# Altium PCB Expansion_hv2.PcbDoc (part 1 of 2)
Units mm, origin at the board's own origin, x right, y up, seen from the top; angles counter-clockwise.
Board outline 43 x 71 mm, 2 copper layers (Top Layer, Bottom Layer); 137 components, 76 nets, 388 pads, 241 vias.
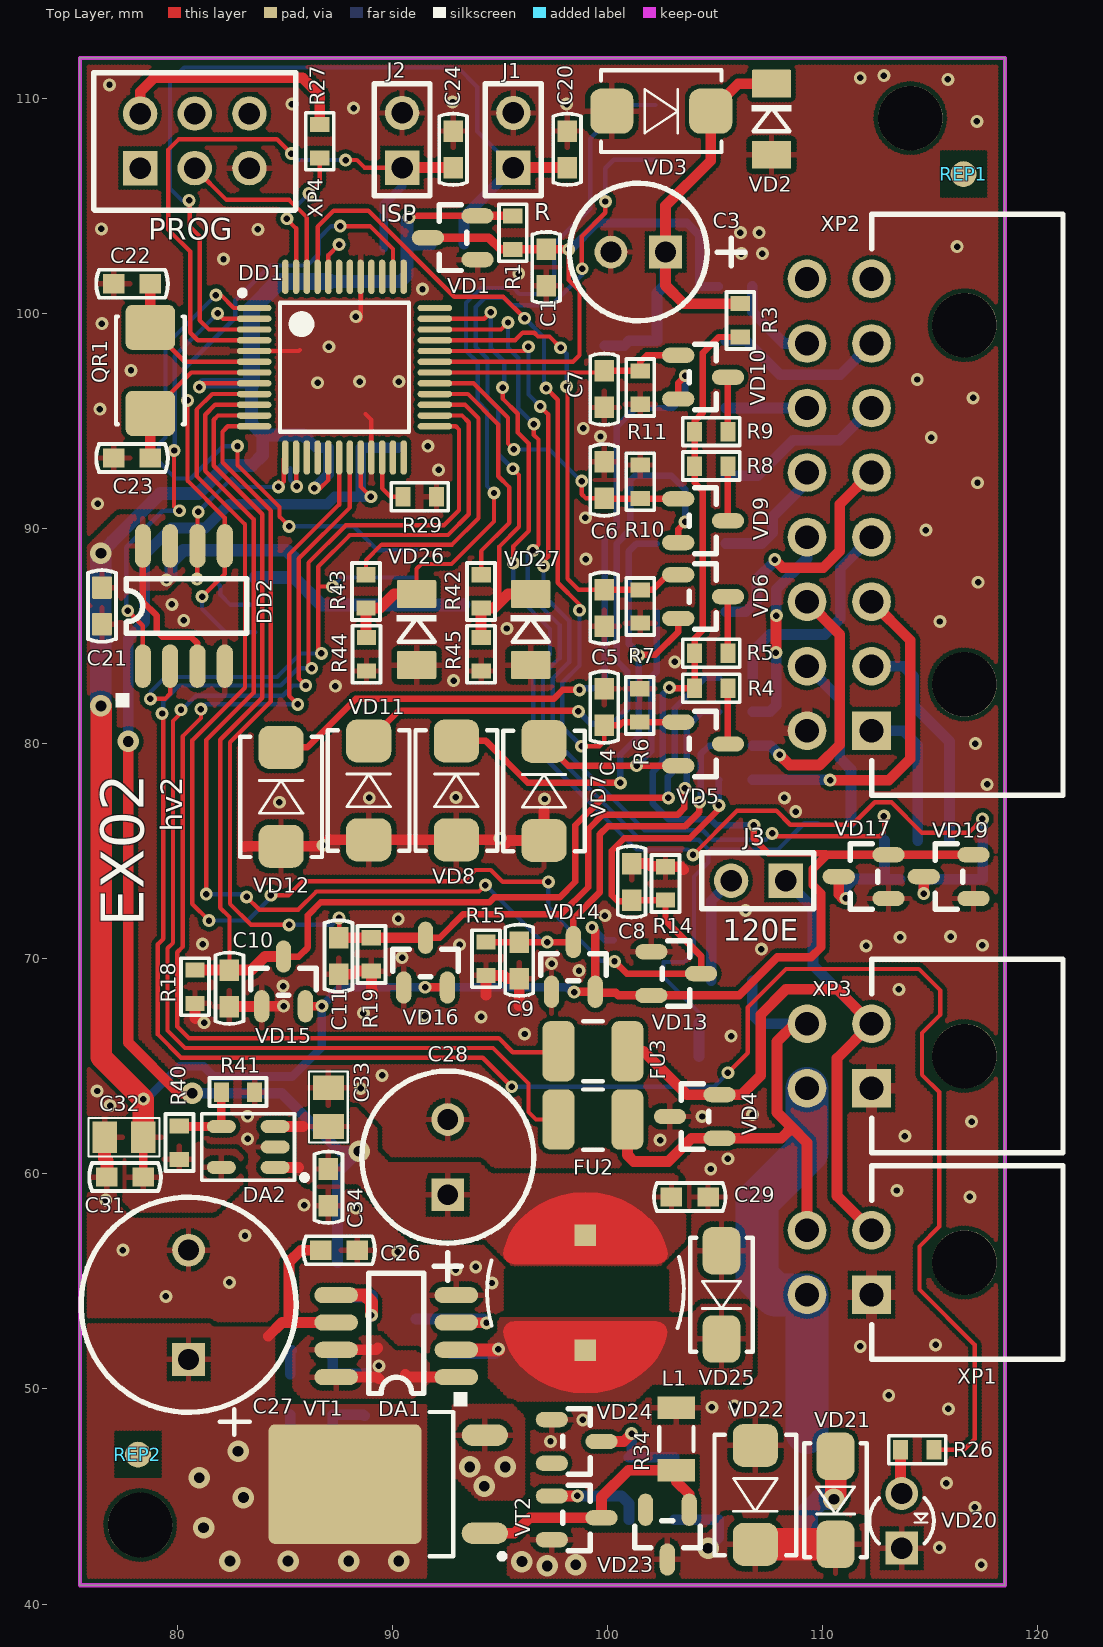
[diagram p0: Top Layer view]
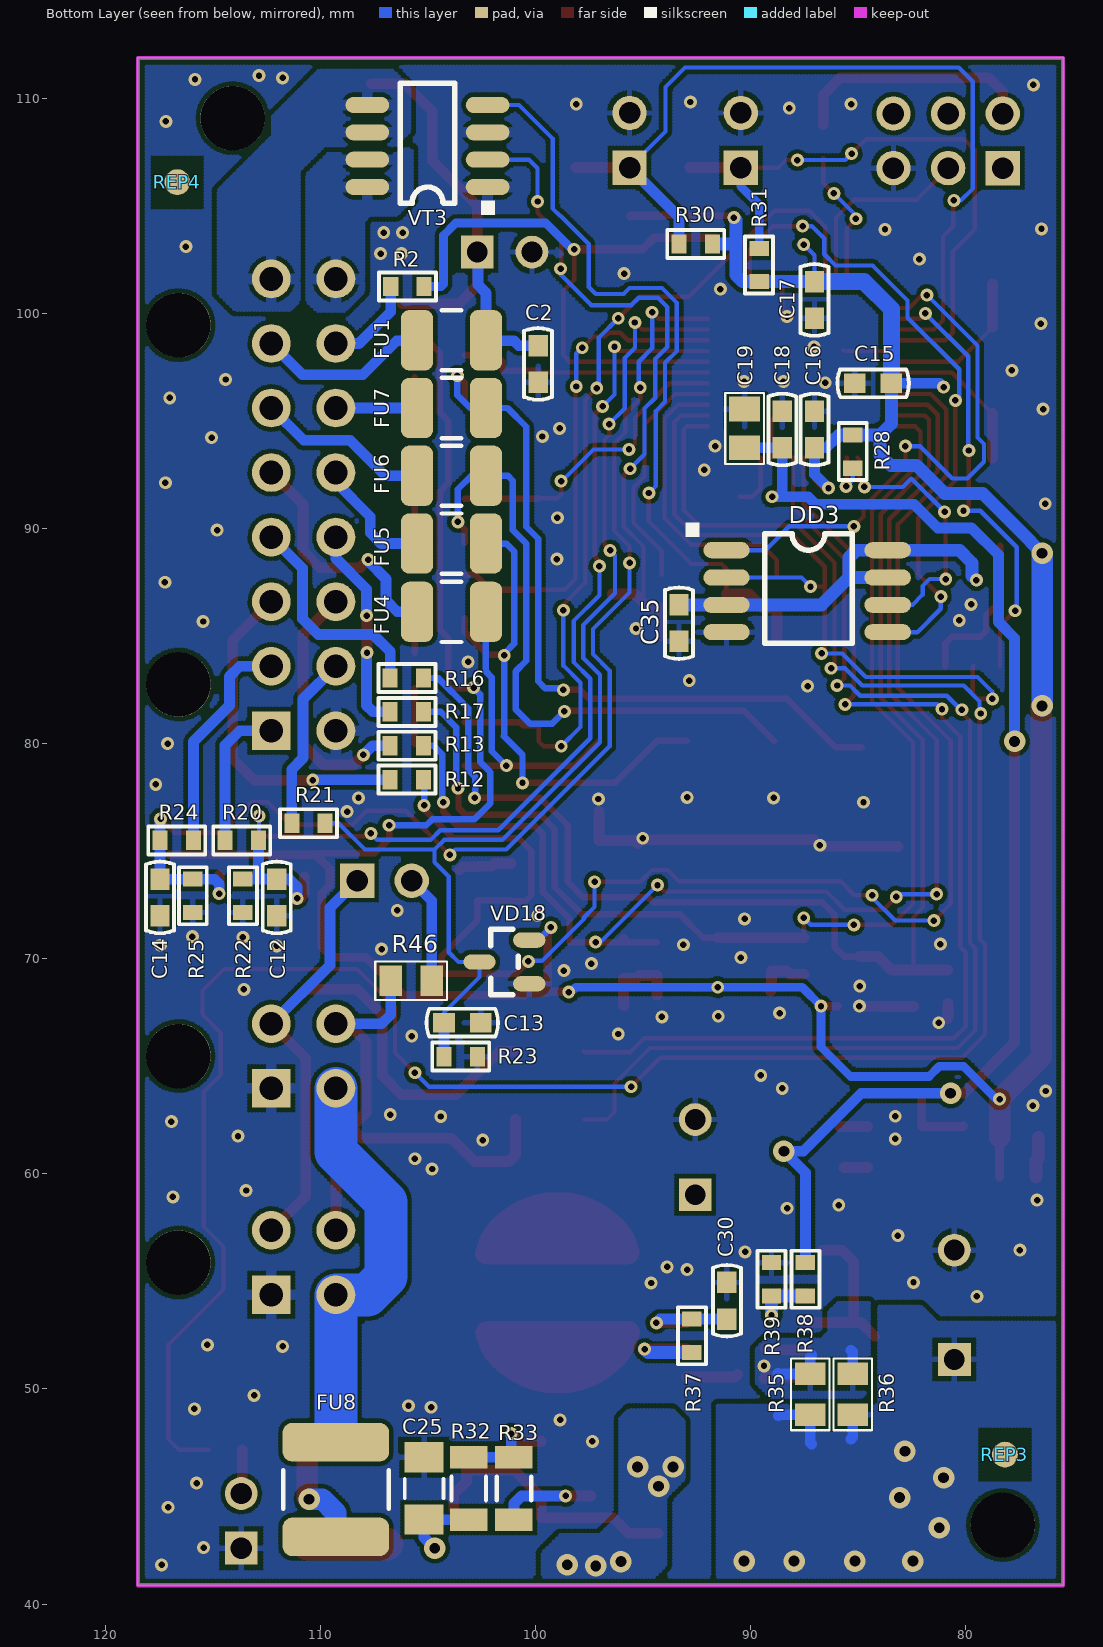
[diagram p1: Bottom Layer view, seen from below]

## Layer stack, top to bottom
Top Solder: solder mask 0.0102, Solder Resist, Dk 3.5
Top Layer: signal copper 0.0356
Dielectric 1: dielectric 0.32, FR-4, Dk 4.8
Bottom Layer: signal copper 0.0356
Bottom Solder: solder mask 0.0102, Solder Resist, Dk 3.5

## Board outline
75.475,40.875 118.475,40.875 118.475,111.875 75.475,111.875

## Design rules (kind name [scope] priority, off if disabled: settings)
Clearance Clearance_1 [InComponent('DD1')] p1: gap=0.2 ignorepadtopadclearanceinfootprint=FALSE
Clearance [All] p2: gap=0.2 ignorepadtopadclearanceinfootprint=FALSE
ComponentClearance [All] p1: gap=0.254 collisioncheckmode=3 verticalgap=2540 showdistances=FALSE
HoleSize [All] p1: absolutevalues=TRUE maxlimit=5 minlimit=0.025 maxpercent=80.000 minpercent=20.000
PolygonConnect PolygonConnect_2 [InComponent('VT3') AND InNet('PWM_CH1')  OR InComponent('VT3') AND InNet('PWM_CH2') OR InComponent('VT3') AND InNet('GND')  OR InComponent('XP2') AND InNet('PWM_CH1')  OR InComponent('XP2') AND InNet('PWM_CH2') OR InComponent('XP2') AND InNet('GND') OR InComponent('XP1') AND InNet('GND') OR InComponent('XP3') AND InNet('GND')] p1: connectstyle=Relief reliefconductorwidth=0.5 reliefentries=4 polygonreliefangle="90 Angle" airgapwidth=0.2
PolygonConnect PolygonConnect_1 [IsVia OR InComponent('VT1') AND InNet('VIN_F')] p2: connectstyle=Direct reliefconductorwidth=0.254 reliefentries=4 polygonreliefangle="90 Angle" airgapwidth=0.254
PolygonConnect [All] p3: connectstyle=Relief reliefconductorwidth=0.25 reliefentries=4 polygonreliefangle="90 Angle" airgapwidth=0.25
RoutingVias [All] p1: holewidth=0.4 width=0.8 viastyle="Through Hole" minholewidth=0.3 minwidth=0.6 maxholewidth=0.5 maxwidth=1
SilkToSolderMaskClearance [IsPad] p1: minsilkscreentomaskgap=0.15 clearancetoexposedcopper=TRUE
SolderMaskExpansion [All] p1: expansion=0.102
Width [All] p1: maxlimit=3 minlimit=0.2 preferedwidth=0.5
27 further rules are at their usual default settings.

## Classes and differential pairs
component class 1Wire: C1 C2 FU1 R1 R2 R3 VD1 VD2 VD3
component class Connections: FU2 FU3 J3 R46 VD4 XP1 XP2 XP3
component class Input_0: C4 C5 C6 C7 FU4 FU5 FU6 FU7 R4 R5 R6 R7 R8 R9 R10 R11 VD5 VD6 VD7 VD8 VD9 VD10 VD11 VD12
component class Input_1: C8 C9 C10 C11 R12 R13 R14 R15 R16 R17 R18 R19 VD13 VD14 VD15 VD16
component class Input_analog: C12 C13 C14 R20 R21 R22 R23 R24 R25 VD17 VD18 VD19
component class MCU: C15 C16 C17 C18 C19 C20 C21 C22 C23 C24 C35 DD1 DD2 DD3 J1 J2 QR1 R26 R27 R28 R29 R30 R31 REP1 REP2 REP3 REP4 VD20 XP4
component class Power: C25 C26 C27 C28 C29 C30 C31 C32 C33 C34 DA1 DA2 FU8 L1 R32 R33 R34 R35 R36 R37 R38 R39 R40 R41 VD21 VD22 VD23 VD24 VD25 VT1 VT2
component class PWM: R42 R43 R44 R45 VD26 VD27 VT3

## Components (designator, comment, footprint, x,y, rotation, side; value= is the part's Value field where it differs from the comment)
C1 "33pF" CC0603 97.15,102.125 r90 top
C2 "0.1uF" CC0603 99.875,97.65 r90 bottom
C3 "100uFx35V" CC20X2.54 102.7,102.85 r180 top
C4 "100pF" CC0603 99.85,81.7 r270 top
C5 "100pF" CC0603 99.85,86.3 r90 top
C6 "0.1uF" CC0603 99.848,92.25 r270 top
C7 "0.1uF" CC0603 99.85,96.475 r90 top
C8 "100pF" CC0603 101.121,73.575 r270 top
C9 "100pF" CC0603 95.9,69.925 r90 top
C10 "0.1uF" CC0603 82.425,68.625 r90 top
C11 "0.1uF" CC0603 87.5,70.125 r90 top
C12 "0.1uF" CC0603 112.023,72.85 r90 bottom
C13 "0.1uF" CC0603 103.4,67.027 r0 bottom
C14 "0.1uF" CC0603 117.45,72.85 r90 bottom
C15 "0.1uF" CC0603 84.3,96.75 r0 bottom
C16 "0.1uF" CC0603 87.025,94.6 r90 bottom
C17 "0.1uF" CC0603 87.025,100.625 r270 bottom
C18 "0.1uF" CC0603 88.525,94.602 r270 bottom
C19 "10uFx10V" CC0805 90.275,94.65 r270 bottom
C20 "200pF" CC0603 98.125,107.625 r270 top
C21 "0.1uF" CC0603-3M 76.5,86.4 r90 top
C22 "22pF" CC0603 77.9,101.375 r0 top
C23 "22pF" CC0603 77.9,93.275 r0 top
C24 "200pF" CC0603 92.825,107.625 r270 top
C25 "0.1uF" CC1206 105.175,45.375 r270 bottom
C26 "0.1uF" CC0603 87.525,56.45 r180 top
C27 "470uFx35V" CC16X10_CAP0.5(1)(Primary) 80.525,51.375 r90 top
C28 "1000uFx6.3V" CC8X3.5 92.575,59.025 r90 top
C29 "0.1uF" CC0603 103.825,58.925 r180 top
C30 "300pF" CC0603 91.1,54.1 r270 bottom
C31 "0.1uF" CC0603 77.575,59.85 r180 top
C32 "10uFx6.3V" CC0805 77.525,61.7 r0 top
C33 "4.7uF 6.3V" CC0805 87.025,63.1 r270 top
C34 "0.1uF" CC0603 87.025,59.375 r270 top
C35 "0.1uF" CC0603 93.325,85.6 r270 bottom
DA1 "MC34063" SO-8 92.975,50.55 r90 top
DA2 "AP2210K-ADJTRG1" SOT23-5 83.3,61.25 r180 top
DD1 "LPC11C24FBD48" LQFP-48 87.775,97.5 r0 top
DD2 "FM25CL64-G" SO-8 78.4,83.6 r0 top
DD3 "M25PE16" EIAJ_SO8 91.118,88.99 r180 bottom
FU1 "MICROSMD010F-2" RC1210 103.9,98.75 r180 bottom
FU2 "MICROSMD010F-2" RC1210 99.325,62.525 r180 top
FU3 "MICROSMD010F-2" RC1210 99.325,65.7 r180 top
FU4 "MICROSMD010F-2" RC1210 103.9,86.125 r180 bottom
FU5 "MICROSMD010F-2" RC1210 103.9,89.3 r180 bottom
FU6 "MICROSMD010F-2" RC1210 103.9,92.45 r180 bottom
FU7 "MICROSMD010F-2" RC1210 103.9,95.6 r180 bottom
FU8 "MF-SMDF050" MF-SMDF 109.275,45.325 r270 bottom
J1 "PLS-02" PLS-02 95.625,106.775 r90 top
J2 "PLS-02" PLS-02 90.45,106.775 r90 top
J3 "PLS-02" PLS-02 108.29,73.625 r180 top
L1 "220uH" SDR0805 98.975,54.475 r270 top
QR1 "NX5032GA-12.000MHz LN-CD-1" AC5032_2 78.75,97.35 r270 top
R1 "4k7" RC0603 95.6,103.75 r90 top
R2 "330E" RC0603 105.95,101.25 r180 bottom
R3 "51E" RC0603 106.175,99.675 r270 top
R4 "4k7" RC0603 104.825,82.575 r180 top
R5 "4k7" RC0603 104.825,84.2 r180 top
R6 "100k" RC0603 101.5,81.775 r270 top
R7 "100k" RC0603 101.525,86.375 r90 top
R8 "4k7" RC0603 104.825,92.9 r180 top
R9 "4k7" RC0603 104.825,94.5 r180 top
R10 "100k" RC0603 101.525,92.175 r270 top
R11 "100k" RC0603 101.525,96.55 r90 top
R12 "100k" RC0603 105.975,78.325 r180 bottom
R13 "100k" RC0603 105.975,79.9 r180 bottom
R14 "10k" RC0603 102.696,73.5 r270 top
R15 "10k" RC0603 94.35,70 r90 top
R16 "100k" RC0603 105.975,83.05 r180 bottom
R17 "100k" RC0603 105.975,81.475 r180 bottom
R18 "10k" RC0603 80.825,68.7 r90 top
R19 "10k" RC0603 89.025,70.2 r90 top
R20 "100k" RC0603 113.65,75.5 r180 bottom
R21 "100k" RC0603 110.55,76.3 r180 bottom
R22 "10k" RC0603 113.6,72.925 r90 bottom
R23 "10k" RC0603 103.475,65.45 r0 bottom
R24 "100k" RC0603 116.675,75.5 r0 bottom
R25 "10k" RC0603 115.925,72.925 r90 bottom
R26 "330E" RC0603 114.4,47.175 r180 top
R27 "100E" RC0603 86.625,108 r90 top
R28 "10k" RC0603 85.25,93.575 r270 bottom
R29 "10k" RC0603 91.275,91.475 r180 top
R30 "10k" RC0603 92.55,103.225 r0 bottom
R31 "10k" RC0603 89.6,102.25 r90 bottom
R32 "220k" RC1206 103.1,45.375 r270 bottom
R33 "220k" RC1206 101,45.375 r270 bottom
R34 "220k" RC1206 103.2,47.675 r90 top
R35 "1E" RC0805 87.225,49.75 r270 bottom
R36 "1E" RC0805 85.25,49.75 r270 bottom
R37 "560k" RC0603 92.725,52.475 r90 bottom
R38 "3k 1%" RC0603 87.45,55.1 r270 bottom
R39 "1k 1%" RC0603 89.025,55.1 r270 bottom
R40 "11k 1%" RC0603 80.1,61.45 r270 top
R41 "18k 1%" RC0603 82.825,63.8 r180 top
R42 "220E" RC0603 94.125,87.075 r270 top
R43 "220E" RC0603 88.775,87.075 r270 top
R44 "10k" RC0603 88.8,84.15 r90 top
R45 "10k" RC0603 94.125,84.15 r90 top
R46 "120E" RC0805 105.775,68.975 r0 bottom
REP1 "REPER_POINT_1.2" REPER1.2 116.55,106.475 r90 top
REP2 "REPER_POINT_1.2" REPER1.2 78.175,46.95 r90 top
REP3 "REPER_POINT_1.2" REPER1.2 78.175,46.95 r90 bottom
REP4 "REPER_POINT_1.2" REPER1.2 116.65,106.1 r90 bottom
VD1 "BAT54S" SOT-23(GSD) 93.975,102.5 r90 top
VD2 "BZV55C3V6" SOD-80 107.625,109.025 r270 top
VD3 "SMBJ5.0A" SMB 102.5,109.4 r180 top
VD4 "PESD2CAN" SOT-23(123) 105.225,61.65 r0 top
VD5 "BAT54A" SOT-23(123) 103.275,81 r180 top
VD6 "BAT54A" SOT-23(123) 103.275,87.85 r180 top
VD7 "P6SMBJ28A" SMB 97.05,77.8 r270 top
VD8 "P6SMBJ28A" SMB 92.975,77.825 r270 top
VD9 "BAT54A" SOT-23(123) 103.275,91.375 r180 top
VD10 "BAT54A" SOT-23(123) 103.275,98.05 r180 top
VD11 "P6SMBJ28A" SMB 88.9,77.825 r270 top
VD12 "P6SMBJ28A" SMB 84.825,77.525 r270 top
VD13 "BAT54S" SOT-23(GSD) 102.025,70.325 r270 top
VD14 "BAT54S" SOT-23(GSD) 97.4,68.45 r0 top
VD15 "BAT54S" SOT-23(GSD) 83.925,67.775 r0 top
VD16 "BAT54S" SOT-23(GSD) 90.525,68.65 r0 top
VD17 "BAT54S" SOT-23(GSD) 113.075,72.8 r90 top
VD18 "BAT54S" SOT-23(GSD) 100.276,68.834 r90 bottom
VD19 "BAT54S" SOT-23(GSD) 117.025,72.8 r90 top
VD20 "BL-B45V1-L" LED3 113.675,42.6 r90 top
VD21 "GS1M" SMA 110.6,44.825 r270 top value={Value}
VD22 "SMBJ150A" SMB 106.875,45.075 r90 top
VD23 "BZX84C15" SOT-23(123) 103.8,44.4 r90 top value={Value}
VD24 "BZX84C39" SOT-23(123) 97.4,48.575 r180 top value={Value}
VD25 "SS14" SMA 105.3,54.375 r270 top
VD26 "BZV55C5V1" SOD-80 91.125,85.3 r270 top
VD27 "BZV55C5V1" SOD-80 96.425,85.3 r270 top
VT1 "FQD5P20TM" D-PAK(TO-252AA) 89.8,45.575 r180 top
VT2 "BC807-40" SOT-23(123) 97.4,45.025 r180 top
VT3 "IRF9956" SO-8 102.225,105.875 r90 bottom
XP1 "MIF2X02PRP" MIF2X02PRP 112.275,54.375 r0 top
XP2 "MIF2X08PRP" MIF2X08PRP 112.275,80.6 r0 top
XP3 "MIF2X02PRP" MIF2X02PRP 112.275,63.975 r0 top
XP4 "PLD-06" PIN6 78.275,106.75 r0 top

## Footprints (in the part's own frame and the unit in brackets; to place one, negate y for a bottom-side part, rotate by r counter-clockwise, add the part's x,y. Pads: shape width x height; smd on the part's side, far side on the other; paste and mask are expansions set on the pad)
AC5032_2 [mm]
  rrect30% 2.1x2.3 smd mask+0.05: 1(-2,0) 2(2,0)
  silkscreen extent -2.5,-1.6 2.5,1.6
CC8X3.5 [mil]
  rect 60x60 hole 38 mask+1.97: 1(0,0)
  round 60 hole 38 mask+1.97: 2(137.8,0)
  silkscreen extent -156,-157 226,157
CC16X10_CAP0.5(1)(Primary) [mil]
  round 60 hole 38 mask+1.97: 1(200,0)
  rect 60x60 hole 38 mask+1.97: 2(0,0)
  silkscreen extent -97,-197 297,197
CC20X2.54 [mil]
  rect 60x60 hole 38 mask+1.97: 1(0,0)
  round 60 hole 38 mask+1.97: 2(100,0)
  silkscreen extent -145,-126 176,126
CC0603 [mm]
  rect 1x0.9 smd paste-25.4 mask+0.05: 1(-0.85,0) 2(0.85,0)
  silkscreen extent -1.66,-0.65 1.66,0.65
CC0603-3M [mil]
  rrect10% 40.98x35.98 smd paste-1000 mask+1.97: 1(-33.5,0) 2(33.5,0)
  silkscreen extent -65,-26 65,26
CC0805 [mm]
  rect 1.15x1.45 smd paste-25.4 mask+0.05: 1(-0.9,0) 2(0.9,0)
  silkscreen extent -1.65,-0.9 1.65,0.9
CC1206 [mm]
  rect 1.4x1.8 smd paste-25.4 mask+0.05: 1(-1.45,0) 2(1.45,0)
  silkscreen extent -0.45,-0.9 0.45,0.9
D-PAK(TO-252AA) [mm]
  oval 2.15x1 smd mask+0.05: 1(-4.5,2.28) 3(-4.5,-2.28)
  rrect10% 7.1x5.55 smd mask+0.05: 2(2,0)
  silkscreen extent -5.42,-3.35 -1.92,3.47
EIAJ_SO8 [mil]
  oval 85x29.53 smd mask+1.97: 1(0,0) 2(0,-50) 3(0,-100) 4(0,-150) 5(295,-150) 6(295,-100) 7(295,-50) 8(295,0)
  silkscreen extent -75,-170 230,50
LED3 [mil]
  rect 60x60 hole 39 mask+1.97: 1(0,0)
  round 60 hole 39 mask+1.97: 2(100,0)
  silkscreen extent 8,-59 92,59
LQFP-48 [mm]
  oval 1.6x0.3 smd mask+0.05: 1(-4.2,2.75) 2(-4.2,2.25) 3(-4.2,1.75) 4(-4.2,1.25) 5(-4.2,0.75) 6(-4.2,0.25) 7(-4.2,-0.25) 8(-4.2,-0.75) 9(-4.2,-1.25) 10(-4.2,-1.75) 11(-4.2,-2.25) 12(-4.2,-2.75) 25(4.2,-2.75) 26(4.2,-2.25) 27(4.2,-1.75) 28(4.2,-1.25) 29(4.2,-0.75) 30(4.2,-0.25) 31(4.2,0.25) 32(4.2,0.75) 33(4.2,1.25) 34(4.2,1.75) 35(4.2,2.25) 36(4.2,2.75)
  oval 0.3x1.6 smd mask+0.05: 13(-2.75,-4.2) 14(-2.25,-4.2) 15(-1.75,-4.2) 16(-1.25,-4.2) 17(-0.75,-4.2) 18(-0.25,-4.2) 19(0.25,-4.2) 20(0.75,-4.2) 21(1.25,-4.2) 22(1.75,-4.2) 23(2.25,-4.2) 24(2.75,-4.2) 37(2.75,4.2) 38(2.25,4.2) 39(1.75,4.2) 40(1.25,4.2) 41(0.75,4.2) 42(0.25,4.2) 43(-0.25,4.2) 44(-0.75,4.2) 45(-1.25,4.2) 46(-1.75,4.2) 47(-2.25,4.2) 48(-2.75,4.2)
  silkscreen extent -4.87,-3 3,3.57
MF-SMDF [mm]
  rrect50% 1.8x4.95 smd mask+0.05: 1(-2.2,0) 2(2.2,0)
  silkscreen extent -0.9,-2.45 0.9,2.45
MIF2X02PRP [mm]
  rect 1.8x1.8 hole 1.1 mask+0.05: 1(0,0)
  round 1.8 hole 1.1 mask+0.05: 2(0,3) 3(-3,0) 4(-3,3)
  round 3 hole 3 unplated mask+0.05: 5(4.32,1.5)
  silkscreen extent 0,-3 8.9,6
MIF2X08PRP [mm]
  rect 1.8x1.8 hole 1.1 mask+0.05: 1(0,0)
  round 1.8 hole 1.1 mask+0.05: 2(0,3) 3(0,6) 4(0,9) 5(0,12) 6(0,15) 7(0,18) 8(0,21) 9(-3,0) 10(-3,3) 11(-3,6) 12(-3,9) 13(-3,12) 14(-3,15) 15(-3,18) 16(-3,21)
  round 3 hole 3 unplated mask+0.05: 17(4.32,2.15) 18(4.32,18.85)
  silkscreen extent 0,-3 8.9,24
PIN6 [mm]
  rect 1.6x1.6 hole 1 mask+0.05: 1(0,0)
  round 1.6 hole 1 mask+0.05: 2(0,2.54) 3(2.54,0) 4(2.54,2.54) 5(5.08,0) 6(5.08,2.54)
  silkscreen extent -2.16,-1.96 7.24,4.44
PLS-02 [mm]
  rect 1.6x1.6 hole 1 mask+0.05: 1(0,0)
  round 1.6 hole 1 mask+0.05: 2(2.54,0)
  silkscreen extent -1.3,-1.3 3.9,1.3
RC0603 [mm]
  rect 0.7x0.9 smd paste-25.4 mask+0.05: 1(-0.775,0) 2(0.774,0)
  silkscreen extent -1.32,-0.65 1.33,0.65
RC0805 [mm]
  rect 1.05x1.4 smd paste-25.4 mask+0.05: 1(-0.95,0) 2(0.95,0)
  silkscreen extent -1.67,-0.89 1.67,0.89
RC1206 [mm]
  rect 1.05x1.75 smd paste-25.4 mask+0.05: 1(-1.45,0) 2(1.45,0)
  silkscreen extent -0.55,-0.8 0.55,0.8
RC1210 [mm]
  rrect50% 1.5x2.8 smd mask+0.05: 1(-1.6,0) 2(1.6,0)
  silkscreen extent -0.45,-1.4 0.45,1.4
REPER1.2 [mm]
  round 1.2 smd paste-25.4 mask+0.05: 1(0,0)
  Top Layer pour cut-out: -1.2,-1.2 1.2,-1.2 1.2,1.2 -1.2,1.2
SDR0805 [mm]
  rect 1x1 smd paste-25.4 mask+0.05: 1(-2.667,0) 2(2.667,0)
  Top Layer region: 1.327,-3.319 1.362,-3.503 1.461,-3.66 1.612,-3.771 1.792,-3.818 1.977,-3.797 2.318,-3.69 2.706,-3.535 3.065,-3.321 3.387,-3.053 3.392,-3.047 3.771,-2.627 4.09,-2.16 4.345,-1.654 4.53,-1.119 4.642,-0.565 4.68,0 4.642,0.565 4.53,1.119 4.345,1.654 4.09,2.16 3.771,2.627 3.392,3.047 3.381,3.059 3.063,3.323 2.709,3.534 2.325,3.688 1.996,3.791 1.806,3.813 1.62,3.764 1.465,3.65 1.363,3.488 1.327,3.299
  Top Layer region: -1.327,3.319 -1.362,3.503 -1.461,3.66 -1.612,3.771 -1.792,3.818 -1.977,3.797 -2.318,3.69 -2.706,3.535 -3.065,3.321 -3.387,3.053 -3.392,3.047 -3.771,2.627 -4.09,2.16 -4.345,1.654 -4.53,1.119 -4.642,0.565 -4.68,0 -4.642,-0.565 -4.53,-1.119 -4.345,-1.654 -4.09,-2.16 -3.771,-2.627 -3.392,-3.047 -3.381,-3.059 -3.063,-3.323 -2.709,-3.534 -2.325,-3.688 -1.996,-3.791 -1.806,-3.813 -1.62,-3.764 -1.465,-3.65 -1.363,-3.488 -1.327,-3.299
  silkscreen extent -1.66,-4.57 1.64,4.57
SMA [mm]
  rrect50% 2.2x1.75 smd mask+0.05: 1(-2.05,0) 2(2.05,0)
  silkscreen extent -2.65,-1.45 2.65,1.45
SMB [mm]
  rrect50% 2x2.1 smd mask+0.05: 1(2.3,0) 2(-2.3,0)
  silkscreen extent -2.8,-1.9 2.8,1.9
SO-8 [mil]
  oval 29.53x80 smd mask+1.97: 1(0,0) 2(50,0) 3(100,0) 4(150,0) 5(150,220) 6(100,220) 7(50,220) 8(0,220)
  silkscreen extent -53,-20 190,160
SOD-80 [mm]
  rrect10% 1.3x1.83 smd paste-25.4 mask+0.05: 1(1.651,0) 2(-1.651,0)
  silkscreen extent -0.66,-0.91 0.56,0.91
SOT23-5 [mm]
  oval 1.35x0.6 smd mask+0.05: 1(-1.25,0.95) 2(-1.25,0) 3(-1.25,-0.95) 4(1.25,-0.95) 5(1.25,0.95)
  silkscreen extent -2.74,-1.55 2.16,1.55
SOT-23(123) [mil]
  oval 59.06x28.07 smd mask+1.97: 1(-0.5,0) 2(-0.5,80) 3(-91.5,40)
  silkscreen extent -71,-20 -20,100
SOT-23(GSD) [mil]
  oval 28.07x59.06 smd mask+1.97: 1(0,0.5) 2(80,0.5) 3(40,91.5)
  silkscreen extent -20,21 100,70

## Part data
C1 C2 C4 C5 C6 C7 C8 C9 C10 C11 C12 C13 C14 C15 C16 C17 C18 C20 C21 C22 C23 C24 C26 C29 C30 C31 C34 C35: library part CC0603, "CC0603"
C3: library part CAP0.25, "CAP0.25"
C19 C32 C33: library part CC0805, "CC0805"
C25: library part CC1206, "CC1206"
C27: library part CAP0.5(1), "CAP0.5(1)"
C28: library part CAP0.35, "CAP0.35"
DA2: library part MCP1824T-ADJE/OT, "300 mA, Low Voltage, Low Quiescent Current LDO Regulator, 5-Pin SOT-223, Extended Temperature, Tape and Reel", ComponentLink1Description="Manufacturer Link", ComponentLink1URL=http://www.microchip.com, ComponentLink2Description=Datasheet, ComponentLink2URL=http://ww1.microchip.com/downloads/en/DeviceDoc/22070a.pdf, ComponentLink3Description="Packaging Specification", ComponentLink3URL=http://ww1.microchip.com/downloads/en/PackagingSpec/00049AW.pdf, DatasheetVersion="revA, Aug-2007", PackageDescription="5-Lead Plastic Small Outline Transistor (DC) [SOT-223]", PackageReference=SOT-223-DC5, PackageVersion="revAW, Oct-2008", Published=29-Jan-2009, Publisher="Altium Limited"
DD3: library part S25FL016A0LMFI01, "S25FL016A0LMFI01"
FU1 FU2 FU3 FU4 FU5 FU6 FU7: library part MICROSMD, "MICROSMD"
FU8: library part MF-SMDF, "MF-SMDF"
L1: library part SDR0805, "SDR0805"
QR1: library part AC5032_2, "AC5032/2"
R1 R2 R3 R4 R5 R6 R7 R8 R9 R10 R11 R12 R13 R14 R15 R16 R17 R18 R19 R20 R21 R22 R23 R24 R25 R26 R27 R28 R29 R30 R31 R37 R38 R39 R40 R41 R42 R43 R44 R45: library part RC0603, "RC0603"
R32 R33 R34: library part RC1206, "RC1206"
R35 R36 R46: library part RC0805, "RC0805"
REP1 REP2 REP3 REP4: library part REPER1.2, "REPER1.2"
VD1 VD5 VD6 VD9 VD10 VD13 VD14 VD15 VD16 VD17 VD18 VD19: "1.0 Ampere General Purpose Rectifier", ComponentField6="Published 8-Jun-2000, Modified 11-July-2000: SIM Model Added."
VD2: library part BZV55C5V1, "Zener Voltage Regulator Diode", ComponentField6="Pin 2 is not connected and not drawn.", ComponentField7="Published 29-Sep-2000", OriginalName=BZX84C10LT1
VD3 VD7 VD8 VD11 VD12 VD22: library part SMBJ, "SMBJ"
VD4: "TVS for CAN"
VD20: library part LED_3, "LED_3"
VD23 VD24: library part BZX84, "Zener Voltage Regulator Diode"
VD25: "Schottky Rectifier", ComponentField6="Published 8-Jun-2000, Modified 10-July-2000: SIM Model Added.", OriginalName=10BQ100
VD26 VD27: "Zener Voltage Regulator Diode", ComponentField6="Pin 2 is not connected and not drawn.", ComponentField7="Published 29-Sep-2000", OriginalName=BZX84C10LT1
VT1: library part IRFR9220, "HEXFET Power MOSFET", ComponentField7="Published 8-Jun-2000", OriginalName=IRLML5103
VT2: library part BC857B, "BC857B", ComponentField7="Published 29-Sep-2000", OriginalName=BC846BLT1
VT3: "HEXFET Power MOSFET", ComponentField7="Published 8-Jun-2000", OriginalName=IRLML2402
XP4: "PLD06"

## Free pads (board coordinates)
  round 3 hole 3 unplated mask+0.05: 0(78.275,43.675) 0(114.075,109.075)

## Via types
v1: diameter 0.6, hole 0.3, Top Layer to Bottom Layer, 220 vias
v2: diameter 1, hole 0.5, Top Layer to Bottom Layer, 21 vias

## Nets (pads, with @x,y where several pads share a name; then routed paths per layer and width w, separated by ;. In a path a pad name is that pad's centre, name@x,y a point inside that pad or via, vN(x,y) a via of type N, cw(c..) or ccw(c..) an arc to the next point about the centre after c; other vN are vias at no path point)
1_WIRE_PWR: FU1.1 XP2.7 | length 8
  Bottom Layer w0.5: FU1.1@105.5,98.725 106.45,98.725 108.025,97.15 110.825,97.15 XP2.7@112.275,98.6
1WIRE: C1.2 DD1.31 R1.1 R2.2 VD1.3 | length 28.8
  Top Layer w0.2: DD1.31@91.975,97.75 98.4,97.75 98.7,98.05 98.7,101.05 98.2,101.55 v1(98.2,102.975)
  Top Layer w0.4: VD1.3@91.651,103.516 94.48,103.516 95.021,102.975 R1.1@95.6,102.975 C1.2@97.15,102.975 v1(98.2,102.975)
  Bottom Layer w0.4: v1(98.2,102.975) 98.29,102.975 99.515,104.2 103.7,104.2 104.275,103.625 104.275,101.35 104.375,101.25 R2.2@105.176,101.25
1WIRE_DQ: R2.1 XP2.15 | length 4.3
  Bottom Layer w0.5: R2.1@106.725,101.25 106.725,100.075 108.2,98.6 XP2.15@109.275,98.6
+3V3: C15.1 C16.1 C17.1 C21.2 C31.1 C32.2 C35.1 DA2.5 DD1.8 DD1.17 DD1.44 DD2.3 DD2.7 DD2.8 DD3.3 DD3.7 DD3.8 R1.2 R3.2 R4.2 R5.2 R8.2 R9.2 R28.1 R30.1 R31.1 R40.2 VD1.2 VD13.2 VD14.2 VD15.2 VD16.2 VD17.2 VD18.2 VD19.2 | length 193.1
  Top Layer w0.2: v1(81.025,96.575) 81.2,96.75 DD1.8@83.575,96.75 ; v1(86.375,91.875) 86.65,91.875 87.025,92.25 DD1.17@87.025,93.3 ; DD1.44@87.025,101.7 87.025,102.7 v1(87.525,103.2)
  Top Layer w0.3: DD2.8@78.4,89.188 78.4,86.6 79.05,85.95 79.05,85.225 79.309,84.966 80.634,84.966 80.94,84.66 DD2.3@80.94,83.6 ; v1(90.775,104.45) 90.857,104.532 VD1.2@93.962,104.532 ; v1(102.875,82.6) 102.9,82.575 R4.2@104.051,82.575 R5.2@104.051,84.2 104.051,84.901 104.438,85.288 104.438,91.737 104.051,92.124 R8.2@104.051,92.9 R9.2@104.051,94.5 104.051,95.001 104.438,95.388 104.438,98.163 105.176,98.901 R3.2@106.175,98.901 ; v1(106.805,76.204) 106.805,75.57 107.475,74.9 110.139,74.9 110.207,74.832
  Top Layer w0.4: C31.1@78.425,59.85 C32.2@78.425,61.7 ; VD15.2@85.957,67.788 86.713,67.788 v1(86.725,67.8) ; v1(91.525,68.675) 92.545,68.675 VD16.2@92.557,68.663 ; VD1.2@93.962,104.532 95.592,104.532 R1.2@95.6,104.524 ; v1(98.45,68.45) 98.463,68.463 VD14.2@99.432,68.463 ; v1(99.28,71.453) 99.432,71.301 VD14.2@99.432,68.463 ; VD19.2@117.012,74.832 VD17.2@113.062,74.832 110.207,74.832 109.551,74.176 109.551,73.424 109.925,73.05 109.925,70.525 109.475,70.075 107.9,70.075 106.118,68.293 VD13.2@102.038,68.293 100.507,68.293 100.375,68.425 99.47,68.425 VD14.2@99.432,68.463
  Top Layer w1: v2(76.45,81.75) 76.475,81.725 76.475,65.425 v1(78.425,63.475) C32.2@78.425,61.7
  Bottom Layer w0.2: C17.1@87.025,101.475 87.025,102.7 v1(87.525,103.2) v1@87.775,103.2
  Bottom Layer w0.3: v1(99.28,71.453) 99.867,70.866 VD18.2@100.289,70.866 ; v1(102.875,82.6) 102.575,82.3 102.575,79.15 102.1,78.675 102.1,77.219 102.844,76.475 104.8,76.475 105.071,76.204 v1(106.805,76.204)
  Bottom Layer w0.4: v1(78.425,63.475) 78.575,63.475 80.1,65 81.225,65 81.7,64.525 85.35,64.525 86.725,65.9 v1(86.725,67.8) 87.6,68.675 v1(91.525,68.675) 98.125,68.675 98.35,68.45 v1(98.45,68.45)
  Bottom Layer w0.5: v1(81.025,96.575) 81.2,96.75 C15.1@83.45,96.75 ; 86.025,94.2 86.475,93.75 C16.1@87.025,93.75 87.025,92.525 v1(86.375,91.875)
  Bottom Layer w0.6: v2@76.45,88.65 v2(76.45,88.85) 76.975,89.375 76.975,89.394 78.856,91.275 ; 78.856,91.275 79.206,91.625 80.976,91.625 82.276,92.925 83.475,92.925 83.975,93.425 83.975,94.35 ; v1(79.5,87.6) 79.7,87.8 79.7,88.4 80.29,88.99 DD3.8@83.625,88.99 85.085,88.99 85.43,88.645 85.43,87.72 ; C15.1@83.45,96.75 83.45,94.875 83.975,94.35 ; DD3.7@83.625,87.72 85.43,87.72 ; 86.025,94.2 85.875,94.35 R28.1@85.25,94.35 83.975,94.35 ; C17.1@87.025,101.475 R31.1@89.6,101.475 90.375,101.475 90.675,101.775 90.675,103.175 ; v1(90.775,104.45) 90.675,104.35 90.675,103.175 ; R30.1@91.775,103.225 90.725,103.225 90.675,103.175 ; C35.1@93.325,86.475 93.3,86.45 DD3.3@91.118,86.45 86.7,86.45 85.43,87.72
  Bottom Layer w0.8: C15.1@83.45,96.75 83.45,100.2 84.725,101.475 C17.1@87.025,101.475
  Bottom Layer w1: v2(76.45,81.75) v2@76.45,88.65
+5V: C18.2 C19.2 C28.1 C29.2 C33.2 C34.1 DA2.1 DA2.3 DD1.20 L1.1 R38.1 | length 61.5
  Top Layer w0.2: DD1.20@88.525,93.3 88.525,91.95 v1(89,91.475)
  Top Layer w0.5: v2(77.725,80.1) 77.725,66.1 80.075,63.75 v2(80.7,63.75) ; DA2.1@84.55,60.3 85.65,60.3 ; DA2.3@84.55,62.2 85.85,62.2
  Bottom Layer w0.5: v2(77.725,80.1) 77.725,84.9 78.475,85.65 78.475,88.775 79.725,90.025 81.3,90.025 82.4,91.125 86.975,91.125 87.325,91.475 88.5,91.475 ; v2(80.7,63.75) 84.85,63.75 87.55,61.05 v2(88.45,61.05) 87.45,60.05 R38.1@87.45,55.875 ; v1(89,91.475) 88.5,91.475 ; C19.2@90.275,93.75 88.527,93.75 C18.2@88.525,93.752 88.525,91.5 88.5,91.475
ANALOG1: R20.1 XP2.1 | length 6.9
  Bottom Layer w0.5: XP2.1@112.275,80.6 113.75,80.6 114.425,79.925 R20.1@114.425,75.5
ANALOG1_F: C12.2 DD1.32 R20.2 R22.2 VD17.3 | length 50.7
  Top Layer w0.2: DD1.32@91.975,98.25 96.125,98.25 v1(96.325,98.45) ; v1(96.875,95.675) 97.24,95.31 97.24,88.69 97.025,88.475 v1(97.025,88.25) ; v1@107.475,75.825 v1(107.65,75.825) 107.775,75.7 112.65,75.7 112.85,75.9 v1(112.85,76.625)
  Top Layer w0.5: VD17.3@110.751,73.816 110.751,73.001 110.948,72.804 v1(111.08,72.804)
  Bottom Layer w0.2: v1(96.325,98.45) 96.325,96.225 v1(96.875,95.675) ; v1(97.025,88.25) 97.025,86.9 98.225,85.7 98.225,83.786 97.45,83.011 97.45,80.25 101.725,75.975 104.425,75.975 104.875,75.525 107.35,75.525 v1(107.65,75.825) ; v1(112.85,76.625) 112.85,75.526 R20.2@112.876,75.5
  Bottom Layer w0.5: v1(111.08,72.804) 111.08,73.33 111.45,73.7 C12.2@112.023,73.7 ; R20.2@112.876,75.5 112.876,73.749 112.925,73.7 C12.2@112.023,73.7 ; R22.2@113.6,73.699 C12.2@112.023,73.699
ANALOG2: R21.1 XP2.10 | length 8.8
  Top Layer w0.5: XP2.10@108.7,83.6 XP2.10@109.275,83.6 XP2.10@109.375,83.6
  Bottom Layer w0.5: XP2.10@109.275,83.6 110.8,82.075 110.8,79.325 111.325,78.8 R21.1@111.325,76.3
ANALOG2_F: C13.2 DD1.34 R21.2 R23.2 VD18.3 | length 51.9
  Top Layer w0.2: DD1.34@91.975,99.25 95.05,99.25 v1(95.375,99.575) ; v1(96.53,88.979) 96.79,89.24 96.79,94.135 96.575,94.35 v1(96.575,94.85)
  Bottom Layer w0.2: v1(95.375,99.575) 95.375,98.4 95.85,97.925 95.85,95.575 v1(96.575,94.85) ; v1(96.53,88.979) 96.3,88.75 96.3,86.989 97.775,85.514 97.775,83.973 97,83.198 97,80.064 101.539,75.525 104.239,75.525 104.689,75.075 ; C13.2@104.25,67.027 104.25,67.5 102.6,69.15 VD18.3@102.6,69.85 103.575,69.85 104.025,70.3 104.025,73.825 104.689,74.489 104.689,75.075 ; R21.2@109.776,76.3 109.15,76.3 107.925,75.075 104.689,75.075
  Bottom Layer w0.5: R23.2@104.249,65.45 C13.2@104.25,67.027
ANALOG3: R24.1 XP2.2 | length 10.9
  Top Layer w0.5: XP2.2@111.7,83.6 XP2.2@112.1,83.6
  Bottom Layer w0.5: XP2.2@112.275,83.6 113.75,83.6 114.225,83.125 114.225,81.775 115.9,80.1 R24.1@115.9,75.5
ANALOG3_F: C14.2 DD1.35 R24.2 R25.2 VD19.3 | length 57.3
  Top Layer w0.2: DD1.35@91.975,99.75 94.275,99.75 v1(94.575,100.05) ; v1(95.125,96.55) 95.125,96.036 95.825,95.336 95.825,94.464 96.34,93.949 96.34,89.89 95.625,89.175 v1(95.625,88.4) ; v1(103.975,74.825) 106.025,76.875 107.85,76.875 108.5,76.225 111.375,76.225 112.425,77.275 113.2,77.275 114.625,75.85 116.775,75.85 v1(117.425,76.5)
  Top Layer w0.5: v1(114.7,73.025) 114.701,73.026 VD19.3@114.701,73.816 VD19.3@114.701,73.866
  Bottom Layer w0.2: v1(94.575,100.05) 94.575,98.375 95.2,97.75 95.2,96.625 v1(95.125,96.55) ; v1(95.625,88.4) 95.625,87.027 97.325,85.327 97.325,84.159 96.55,83.384 96.55,79.877 101.352,75.075 103.725,75.075 v1(103.975,74.825)
  Bottom Layer w0.5: v1(114.7,73.025) 114.7,73.475 114.924,73.699 R25.2@115.925,73.699 117.448,73.699 C14.2@117.45,73.7 R24.2@117.449,75.5 117.449,76.476 v1(117.425,76.5)
CAN_LED: DD1.25 R26.1 | length 107.5
  Top Layer w0.2: v1(79.3,81.4) 79.35,81.35 79.35,70.923 79.1,70.673 79.1,70.3 79.1,66.477 80.177,65.4 94.2,65.4 v1(95.55,64.05) ; v1(86.254,83.504) 86.1,83.658 86.1,88.411 87.839,90.15 92.4,90.15 93.1,90.85 93.1,94.6 92.95,94.75 DD1.25@91.975,94.75 ; v1(105.6,64.7) 106.525,65.625 106.525,67.75 108.3,69.525 114.475,69.525 115.475,68.525 115.475,67.4 114.625,66.55 114.625,64.6 115.425,63.8 115.425,57.55 114.5,56.625 114.5,54.625 117.075,52.05 117.075,47.675 116.575,47.175 R26.1@115.175,47.175
  Bottom Layer w0.2: v1(79.3,81.4) 79.354,81.454 79.354,81.962 80.092,82.7 84.809,82.7 85.613,83.504 v1(86.254,83.504) ; v1(95.55,64.05) 104.95,64.05 v1(105.6,64.7)
CANH: FU2.1 R46.2 VD4.1 XP1.4 XP3.4 | length 24.9
  Top Layer w0.5: FU2.1@100.925,62.525 100.925,60.875 101.225,60.575 102.825,60.575 103.9,61.65 VD4.1@105.212,61.65 108.075,61.65 108.575,62.15 ; XP3.4@108.7,66.975 107.875,66.15 107.875,62.85 108.575,62.15 ; XP1.4@109.275,57.375 109.275,61.45 108.575,62.15
  Bottom Layer w0.5: R46.2@106.725,68.975 106.725,67.4 107.15,66.975 XP3.4@109.275,66.975
CANH_F: DD1.19 FU2.2 | length 53.8
  Top Layer w0.2: v1(80.175,81.575) 80.175,81.426 79.8,81.051 79.8,70.736 79.55,70.486 79.55,66.664 80.364,65.85 94.675,65.85 96.325,64.2 96.325,62.875 96.675,62.525 FU2.2@97.725,62.525 ; v1(85.975,82.7) 85.65,83.025 85.65,88.598 88.025,90.973 DD1.19@88.025,93.3
  Bottom Layer w0.2: v1@80.175,81.594 v1(80.175,81.575) 80.226,81.575 80.876,82.225 84.9,82.225 85.375,82.7 v1(85.975,82.7)
CANL: FU3.1 J3.1 VD4.2 XP1.2 XP3.2 | length 35.7
  Top Layer w0.5: FU3.1@100.95,65.7 101.675,65.7 103.693,63.682 VD4.2@105.212,63.682 106.232,63.682 107.125,64.575 107.125,67.4 108.3,68.575 110.675,68.575 XP3.2@112.275,66.975 110.675,65.375 110.675,58.975 XP1.2@112.275,57.375
  Bottom Layer w0.5: J3.1@108.29,73.625 109.55,72.365 109.55,69.7 XP3.2@112.275,66.975
CANL_F: DD1.18 FU3.2 | length 50.7
  Top Layer w0.2: v1(81.1,81.6) 81.1,81.186 80.25,80.336 80.25,70.55 80,70.3 80,66.85 80.55,66.3 94.95,66.3 95.6,65.65 97.7,65.65 FU3.2@97.75,65.7 ; v1(85.6,81.825) 85.2,82.225 85.2,88.784 87.525,91.109 DD1.18@87.525,93.3
  Bottom Layer w0.2: v1(81.1,81.6) 81.325,81.825 v1(85.6,81.825)
D_OUT1: DD1.27 R43.1 | length 13.6
  Top Layer w0.2: R43.1@88.775,87.85 88.775,88.525 89.5,89.25 92.773,89.25 94,90.477 94,95.123 93.373,95.75 DD1.27@91.975,95.75
D_OUT2: DD1.28 R42.1 | length 11.3
  Top Layer w0.2: DD1.28@91.975,96.25 93.509,96.25 94.925,94.834 94.925,92.425 95.44,91.91 95.44,90.263 94.125,88.948 R42.1@94.125,87.85
GND: C1.1 C2.1 C3.2 C4.1 C5.1 C6.1 C7.1 C8.1 C9.1 C10.1 C11.1 C12.1 C13.1 C14.1 C15.2 C16.2 C17.2 C18.1 C19.1 C20.1 C21.1 C22.1 C23.1 C24.1 C25.1 C26.1 C27.1 C28.2 C29.1 C30.1 C31.2 C32.1 C33.1 C34.2 C35.2 DA1.4 DA2.2 DD1.5 DD1.21 DD1.41 DD2.4 DD3.4 J1.2 J2.2 R6.1 R7.1 R10.1 R11.1 R14.1 R15.1 R18.1 R19.1 R22.1 R23.1 R25.1 R29.1 R34.2 R39.1 R41.1 R44.1 R45.1 VD1.1 VD2.1 VD3.1 VD4.3 VD7.1 VD8.1 VD11.1 VD12.1 VD13.1 VD14.1 VD15.1 VD16.1 VD17.1 VD18.1 VD19.1 VD20.1 VD22.1 VD24.1 VD25.1 VD26.1 VD27.1 VT3.1 VT3.3 XP1.1 XP2.9 XP3.1 XP4.5 | length 35.2
  Top Layer w0.2: DD1.5@83.575,98.25 85.65,98.25 85.7,98.3 ; v1@88.45,99.65 88.525,99.725 DD1.41@88.525,101.7 ; 88.75,95.325 89.025,95.05 DD1.21@89.025,93.3
  Top Layer w0.5: R18.1@80.825,67.925 80.825,67.25 80.85,67.225 ; C10.1@82.425,67.775 83.912,67.775 VD15.1@83.925,67.788 84.929,67.788 v1(84.941,67.8) ; 83.15,75.2 83.175,75.225 VD12.1@84.825,75.225 86.725,75.225 v1(86.775,75.275) ; 87.075,75.55 87.1,75.525 VD11.1@88.9,75.525 VD8.1@92.975,75.525 94.938,75.525 v1(95.013,75.6) ; C11.1@87.5,69.275 88.15,69.275 88.3,69.425 R19.1@89.025,69.425 89.025,68.55 89.075,68.5 ; 94.35,68.3 R15.1@94.35,69.225 95.175,69.225 95.325,69.075 C9.1@95.9,69.075 95.9,67.85 95.875,67.825 ; 95.256,75.356 95.4,75.5 VD7.1@97.05,75.5 97.05,76.85 ; C8.1@101.121,74.425 101.9,74.425 102.025,74.3 102.672,74.3 R14.1@102.696,74.275 103.393,74.275 103.528,74.141
  Top Layer w0.6: C32.1@76.625,61.7 76.625,60.725 76.725,60.625 C31.2@76.725,59.85
  other v1: 117.375,41.825 115.425,42.625 117.075,44.5 115.75,45.625 97.35,47.559 98.85,48.563 115.85,49.075 104.85,49.15 105.9,49.218 113.075,49.7 111.75,51.975 115.25,52.05 79.475,54.3 94.625,54.925 82.425,54.95 92.95,55.55 93.875,55.675 90.25,56.375 77.475,56.45 83.15,57.125 88.3,58.4 85.9,58.55 76.675,58.775 116.85,58.925 113.45,59.225 104.8,60.225 105.6,60.7 102.45,61.568 83.275,61.625 113.825,61.75 116.925,62.425 104.4,62.666 83.275,62.675 106.75,62.75 76.875,63.175 76.275,63.85 88.525,63.975 89.525,64.575 105.75,66.4 96.15,66.5 81.25,67.025 94.125,67.3 91.5,67.325 88.65,67.475 113.55,68.575 84.925,68.725 98.675,69.45 97.4,69.775 90.45,70.05 107.15,70.45 112.025,70.6 93.125,70.65 117.425,70.625 81.175,70.675 113.6,71 115.95,71.025 90.275,71.85 99.875,72 106.425,72.25 108.75,76.837 84.75,77.275 97.075,77.425 88.925,77.475 108.225,77.475 92.95,77.5 117.65,78.1 117.1,80 87.35,82.675 92.85,82.925 103.125,83.8 95.325,85.35 115.45,85.675 80.3,85.725 79.75,86.475 117.225,87.5 99,88.575 114.8,89.925 98.975,90.5 76.3,91.15 117.2,92.125 92.15,92.725 91.65,93.825 115.05,94.225 99.675,94.275 98.875,94.65 76.4,95.55 117,96.075 86.525,96.775 88.475,96.825 90.3,96.825 114.4,96.925 77.85,97.35 87.05,98.45 76.5,99.525 88.3,99.85 91.4,101.125 95.875,101.85 82.15,102.525 106.225,102.775 107.2,102.775 116.25,103.1 106.175,103.75 107.05,103.75 83.75,103.9 76.475,103.925 117.175,108.925 88.2,109.541 85.325,109.725 98.1,109.725 92.8,109.825 76.85,110.625 115.825,110.875 111.75,110.95 112.85,111.05